# Altium PCB DualBuck(Single).PcbDoc
Units mm, origin at the board's own origin, x right, y up, seen from the top; angles counter-clockwise.
Board outline 93.78 x 78.49 mm, 4 copper layers (Top Layer, GND, PWR, Bottom Layer), stack 0.603 mm thick; 41 components, 27 nets, 143 pads, 84 vias.
Unrouted connection lines stored in the file: 35.
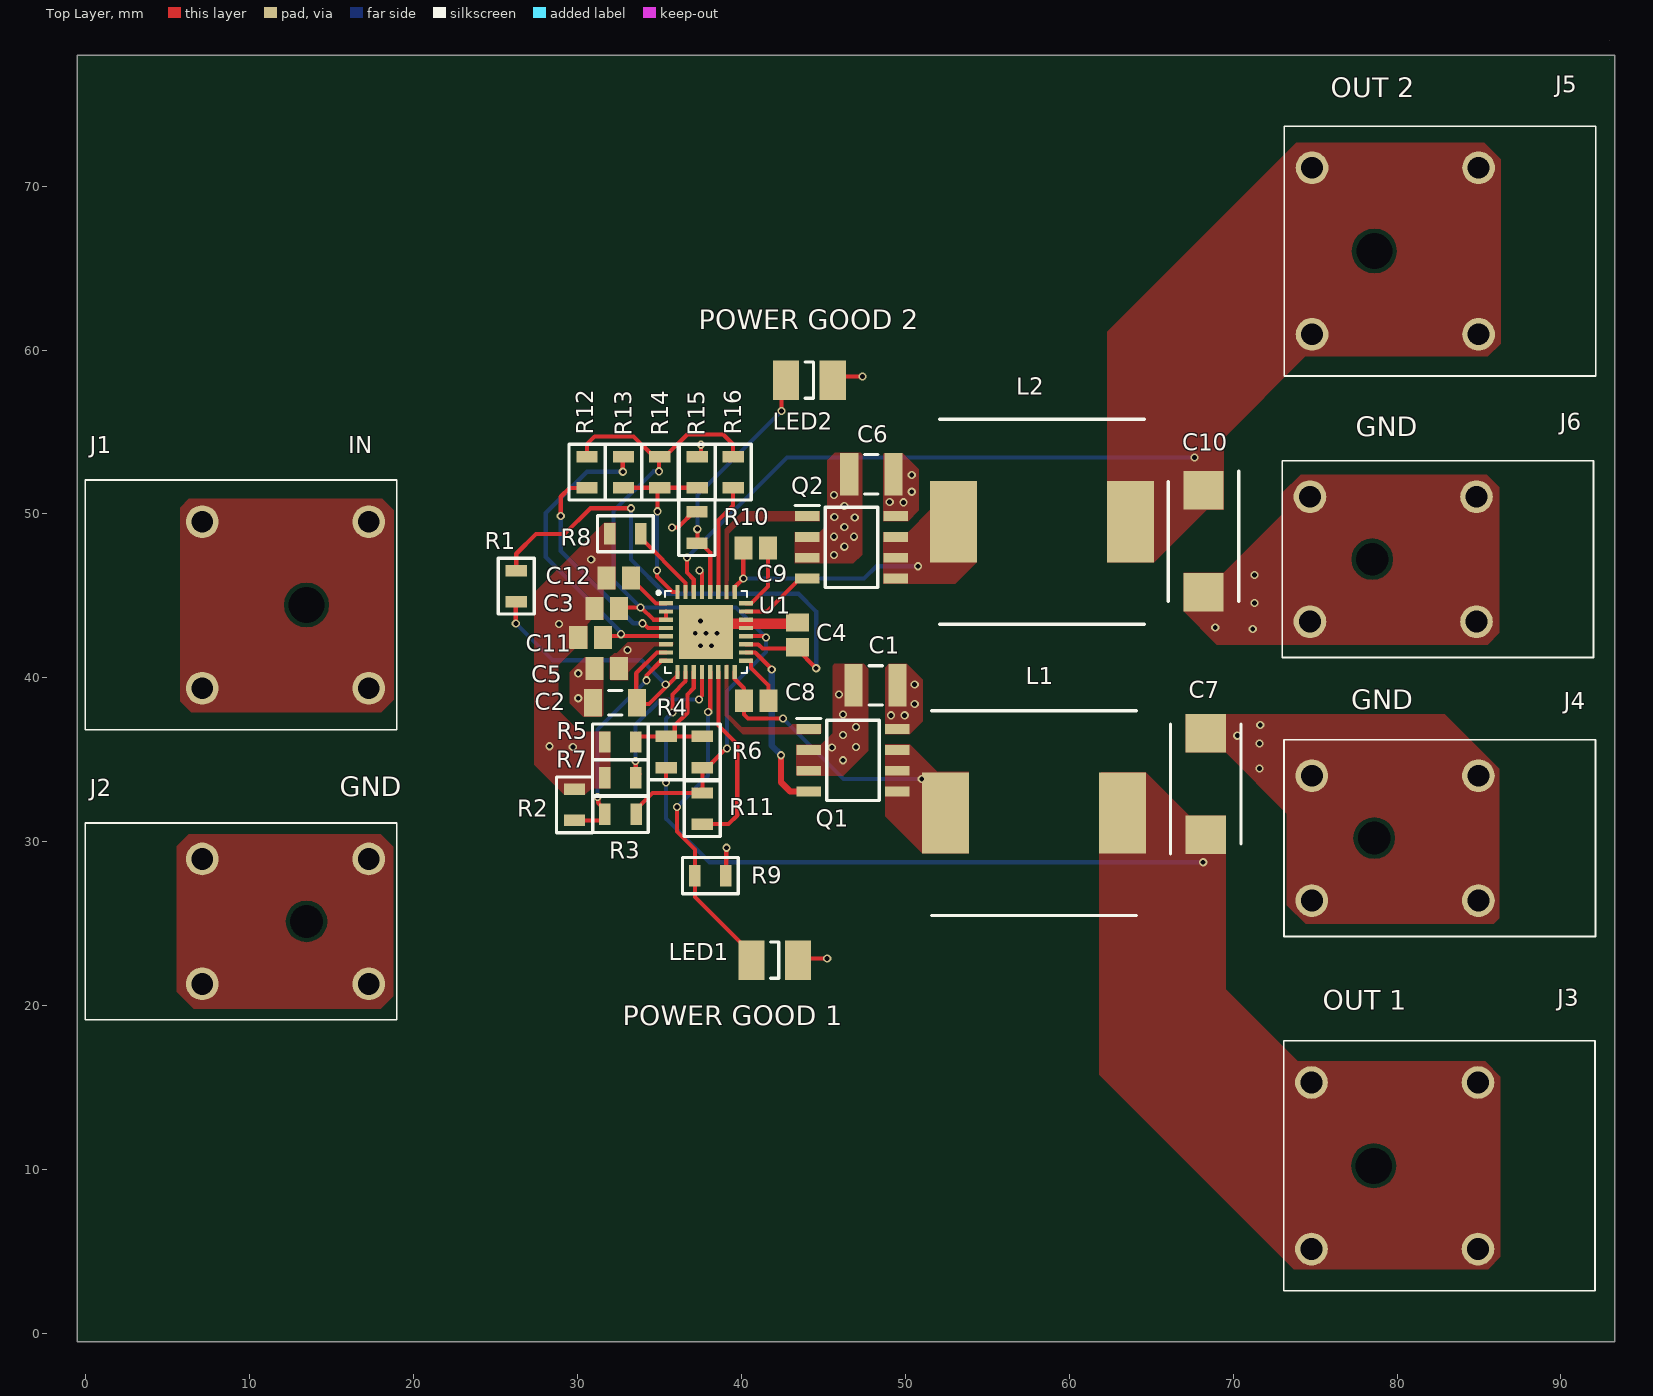
[diagram p0: Top Layer view]
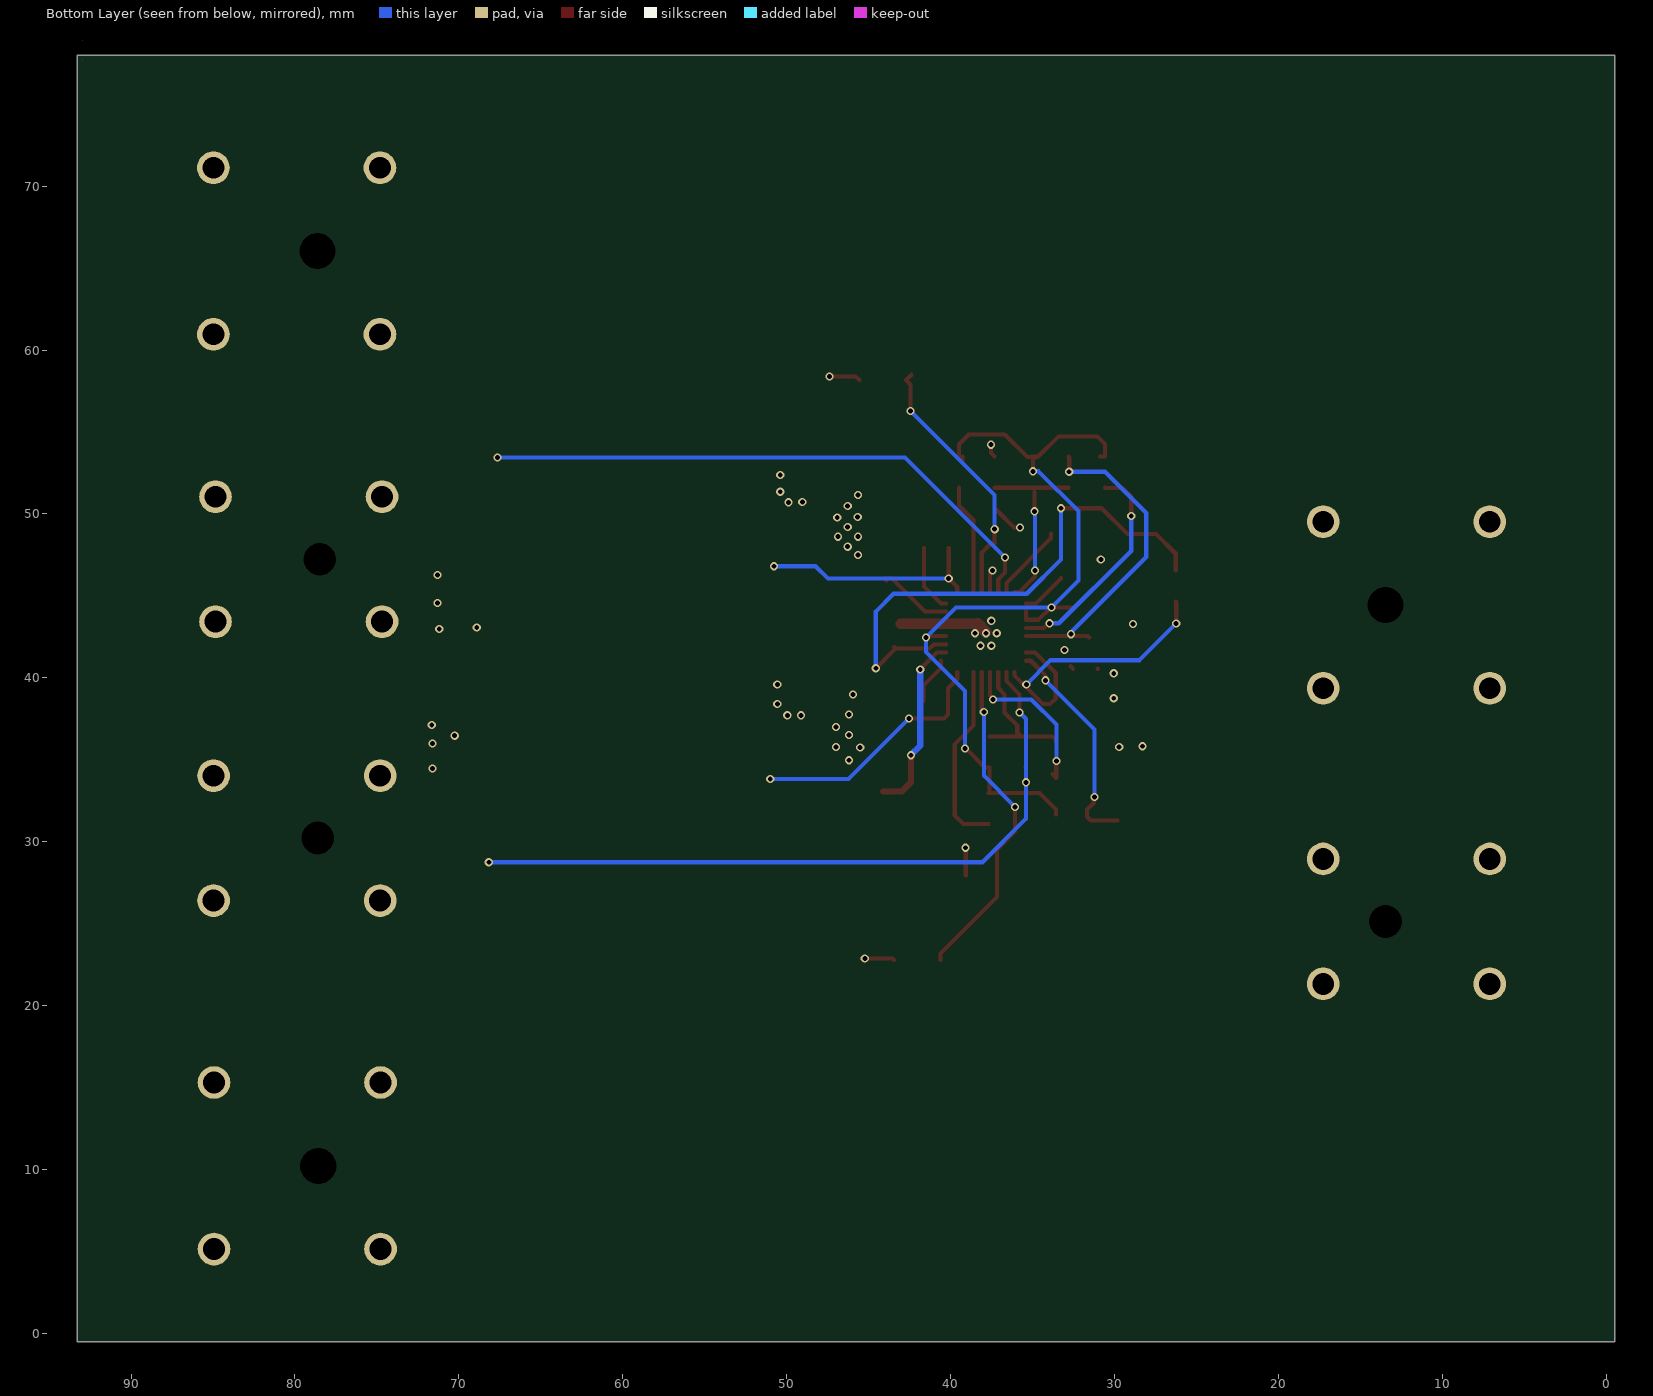
[diagram p1: Bottom Layer view, seen from below]
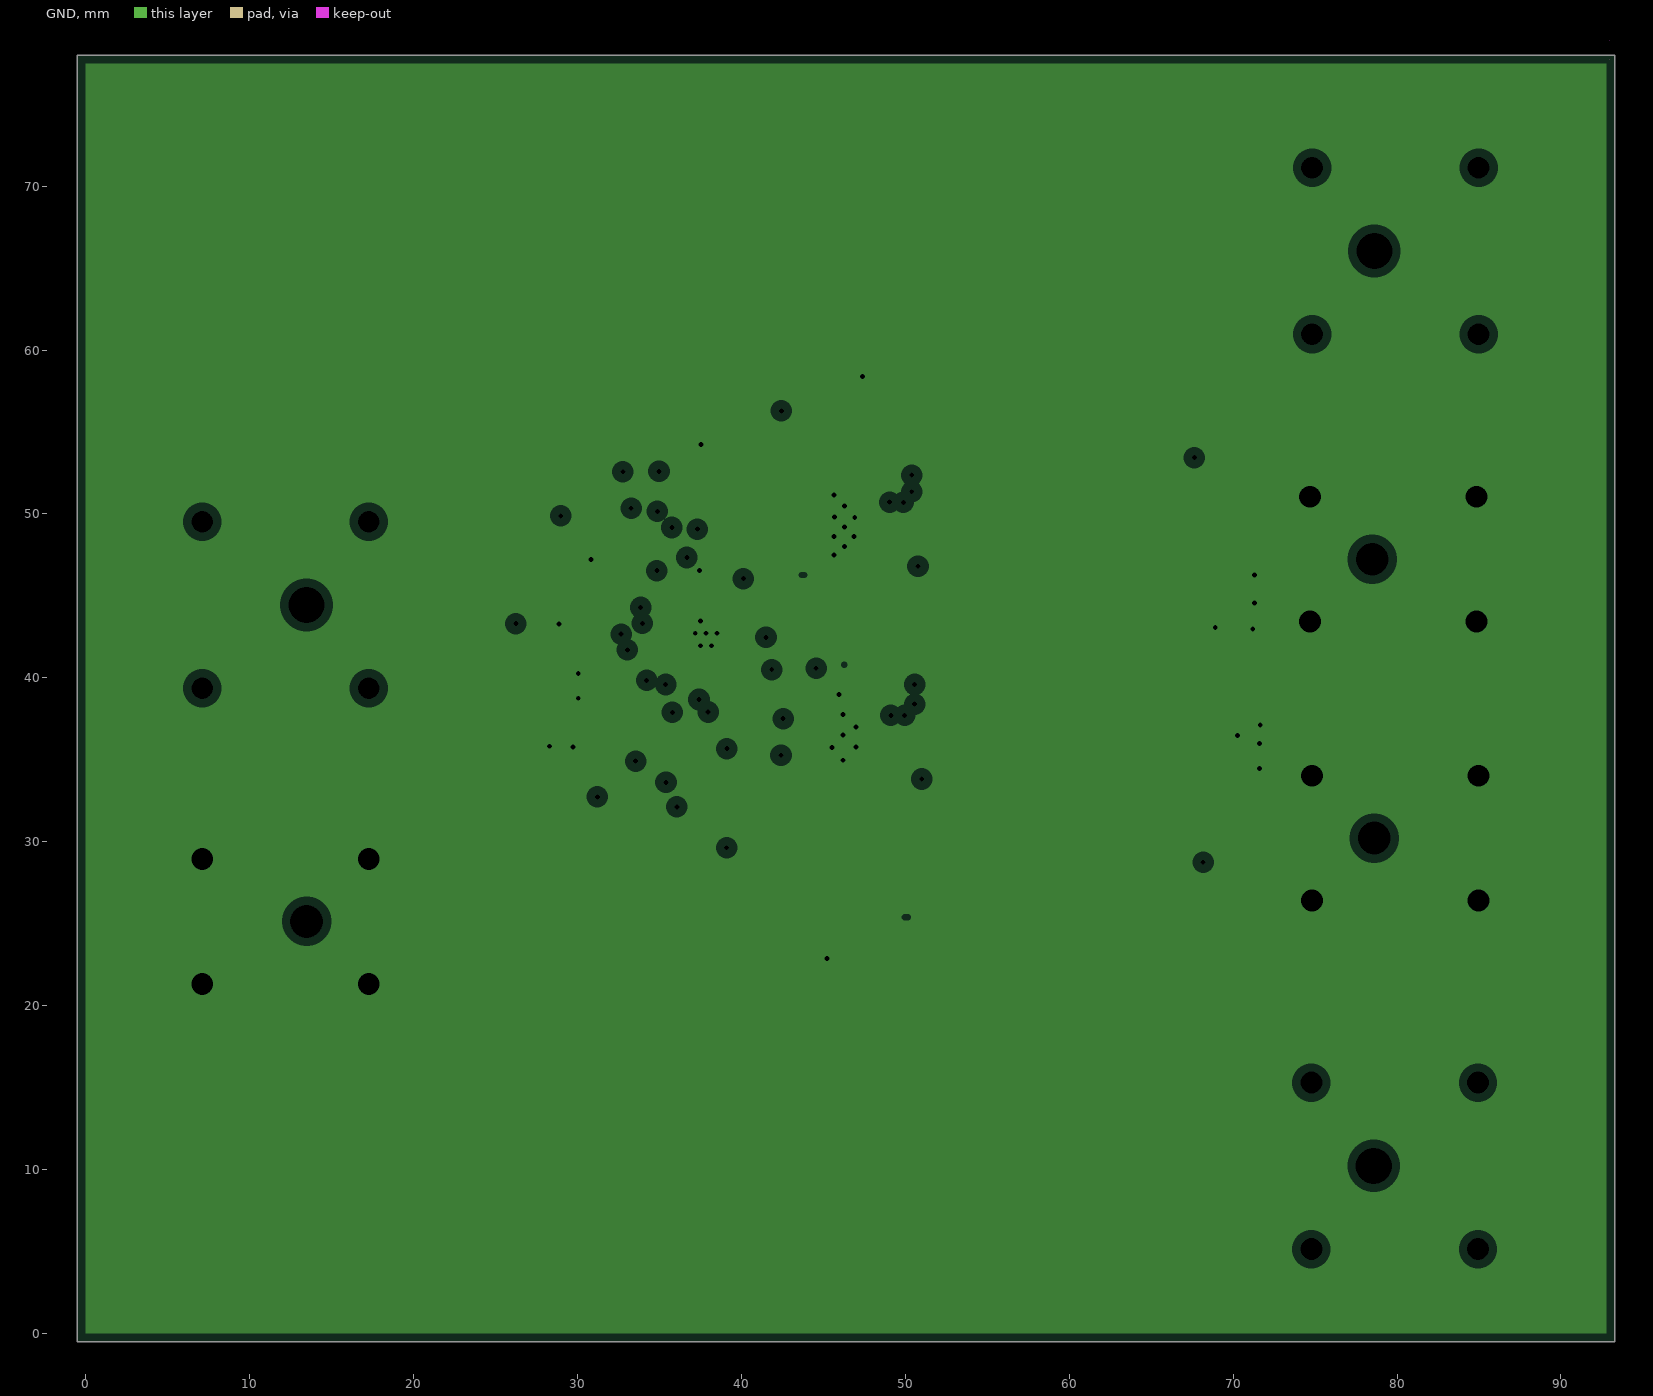
[diagram p2: GND, clearances drawn from the general rule]
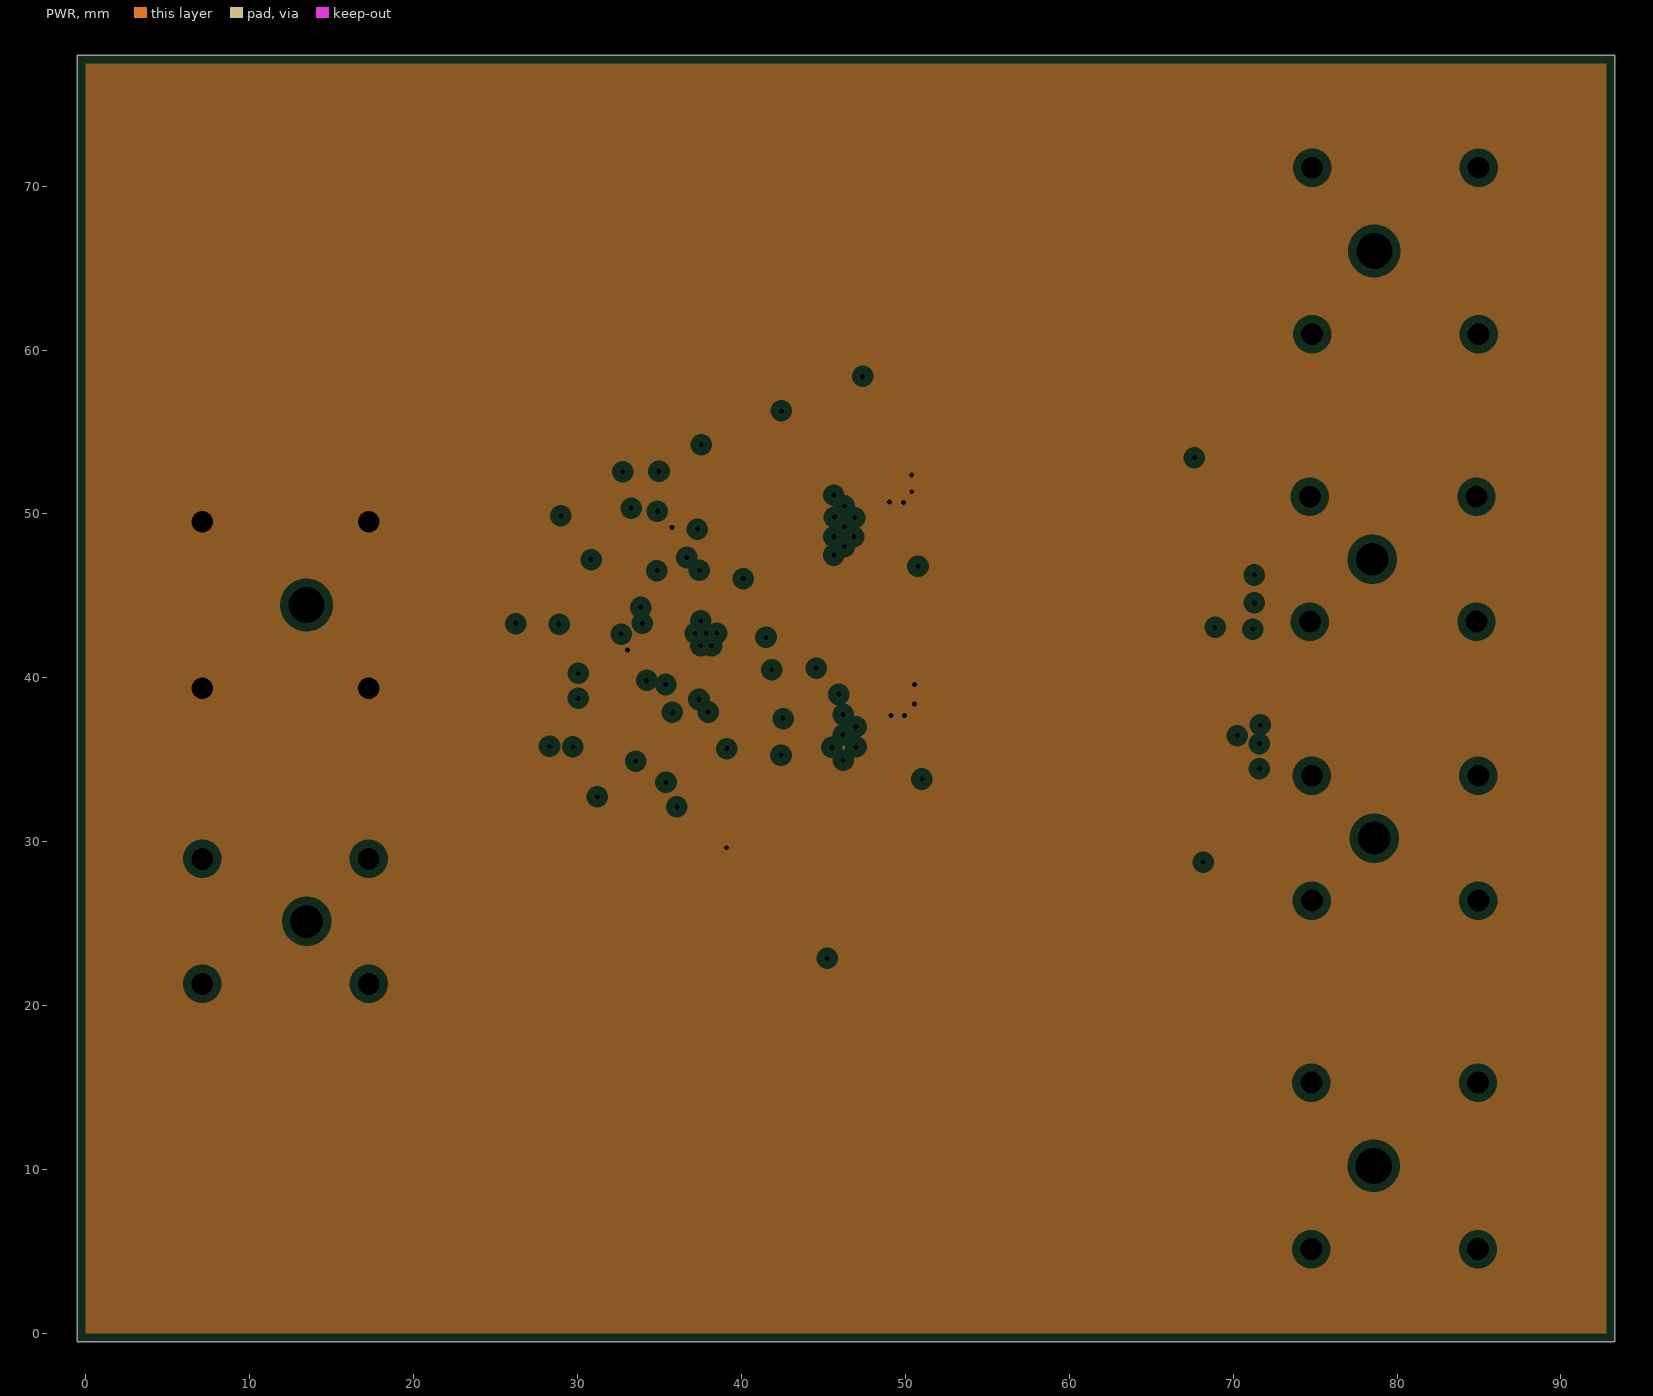
[diagram p3: PWR, clearances drawn from the general rule]
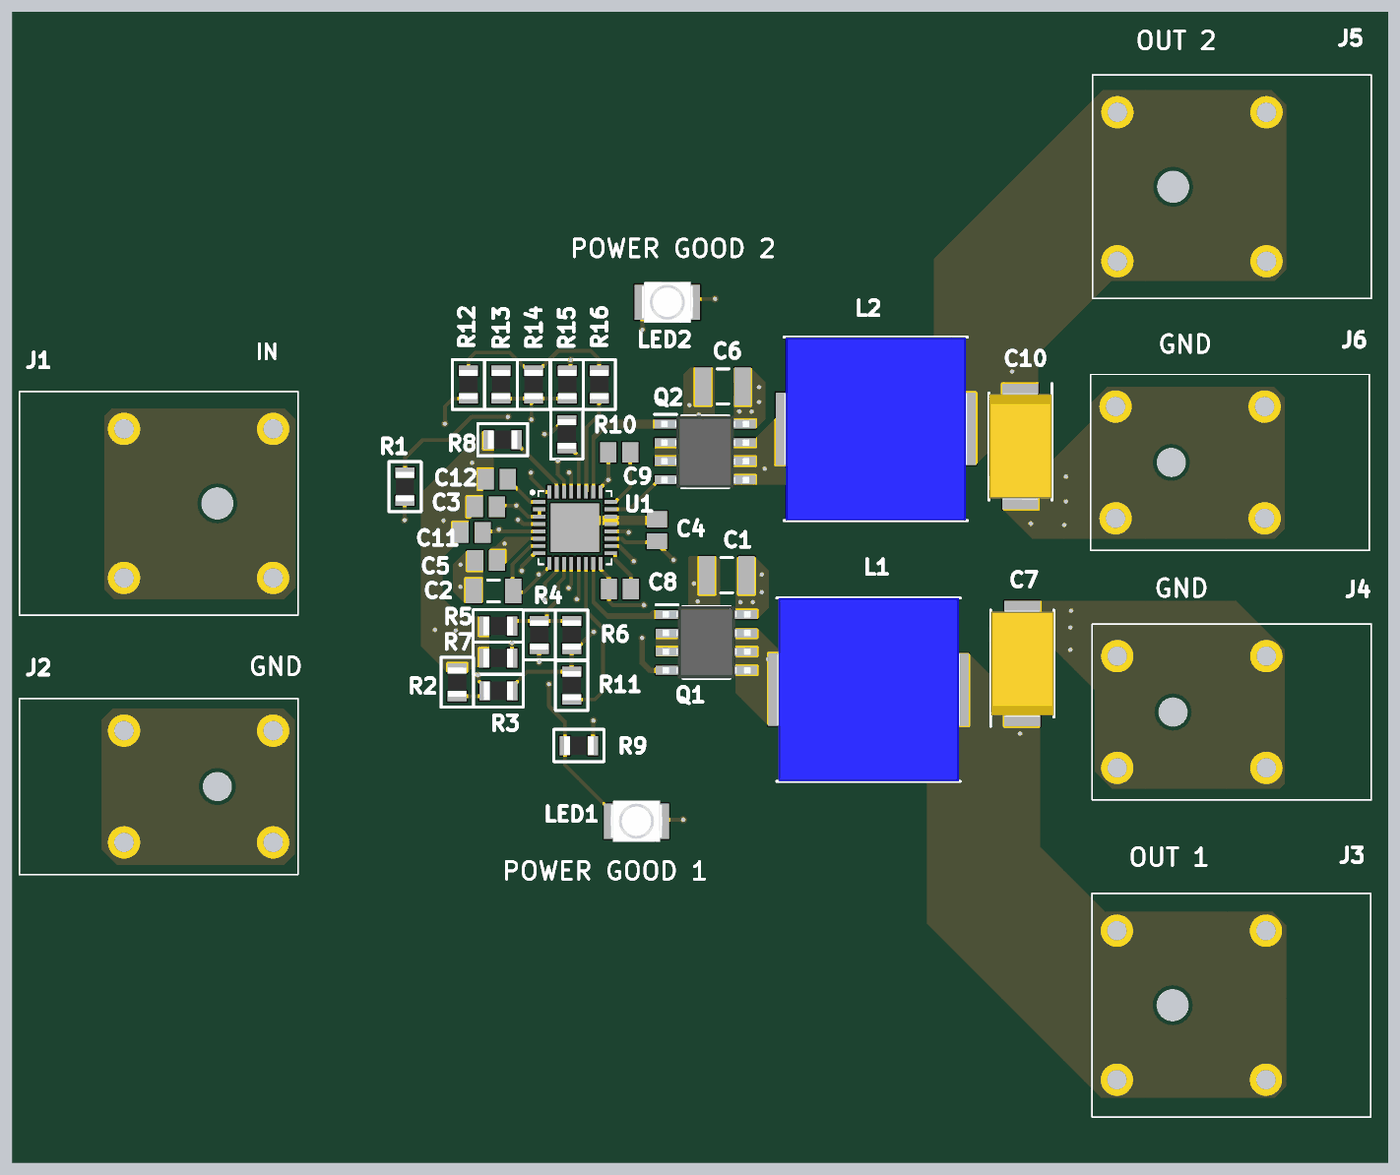
[diagram p4: 3D render of the assembled board from above, using the file's embedded part models]

## Layer stack, top to bottom
Top Solder: solder mask 0.0102, Solder Resist, Dk 3.5
Top Layer: signal copper 0.0356
Dielectric 2: prepreg 0.0711, PP-006, Dk 4.1
GND: plane copper 0.035, net GND
Dielectric 1: dielectric 0.32, FR-4, Dk 4.8
PWR: plane copper 0.035, net +VIN
Dielectric 3: prepreg 0.0711, PP-006, Dk 4.1
Bottom Layer: signal copper 0.0356
Bottom Solder: solder mask 0.0102, Solder Resist, Dk 3.5

## Board outline
-0.508,-0.508 93.272,-0.508 93.272,77.978 -0.508,77.978
cut-out: 92.964,77.724
cut-out: 92.964,78.867
cut-out: 92.075,80.391

## Design rules (kind name [scope] priority, off if disabled: settings)
Clearance [All] p1: gap=0.254 ignorepadtopadclearanceinfootprint=TRUE except(0: Arc-Hole Track-Hole SMDPad-Hole THPad-Hole Via-Hole Fill-Hole Poly-Hole Region-Hole Text-Hole; 0.152: SMDPad-SMDPad; 0.229: Arc-Arc Arc-Track Arc-SMDPad Arc-Fill Arc-Poly Arc-Region Track-Track Track-SMDPad Track-Fill Track-Poly Track-Region)
MinimumSolderMaskSliver [All] p1: minsoldermaskwidth=0.1
PlaneClearance [All] p1: clearance=0.508
PlaneConnect [All] p1: pad.planeconnectstyle=Relief pad.reliefexpansion=0.508 pad.reliefentries=4 pad.reliefconductorwidth=0.635 pad.reliefairgap=0.254 via.planeconnectstyle=Direct via.reliefexpansion=0.508 via.reliefentries=4 via.reliefconductorwidth=0.635 via.reliefairgap=0.254
PolygonConnect [All] p1: connectstyle=Direct reliefconductorwidth=0.254 reliefentries=4 polygonreliefangle="90 Angle" airgapwidth=0.254
RoutingVias [All] p1: holewidth=0.711 width=1.27 viastyle="Through Hole" minholewidth=0.3 minwidth=0.5 maxholewidth=0.711 maxwidth=1.27
SilkToSolderMaskClearance [IsPad] p1: minsilkscreentomaskgap=0.1 clearancetoexposedcopper=TRUE
SolderMaskExpansion [All] p1: expansion=0.102
Width [All] p1: maxlimit=1.27 minlimit=0.203 preferedwidth=0.254 minimp=50.000000 maximp=50.000000 favimp=50.000000
26 further rules are at their usual default settings.

## Components (designator, comment, footprint, x,y, rotation, side; value= is the part's Value field where it differs from the comment)
C1 "" C1210 48.188,39.548 r0 top value=10uF
C2 "" C1206 32.293,38.481 r0 top value=4.7uF
C3 "" C0805 31.775,44.221 r0 top value="1uF, 50V"
C4 "" C0805 43.434,42.621 r270 top value=1uF
C5 "" C0805 31.787,40.564 r0 top value=1uF
C6 "" C1210 47.93,52.426 r0 top value=10uF
C7 "330uF, 10V" CAPPM7343X430N 68.326,33.528 r90 top
C8 "" C0805 40.906,38.608 r180 top value=100nF
C9 "" C0805 40.869,47.93 r0 top value=220nF
C10 "330uF, 10V" CAPPM7343X430N 68.199,48.335 r270 top
C11 "" C0805 30.797,42.469 r0 top value=10nF
C12 "" C0805 32.524,46.101 r0 top value=100nF
J1 "23.3200-21" 23320021 17.272,39.37 r180 top
J2 "23.3200-22" 23320022 17.272,21.336 r0 top
J3 "23.3200-21" 23320021 74.778,15.316 r0 top
J4 "23.3200-22" 23320022 74.803,34.036 r180 top
J5 "23.3200-21" 23320021 74.813,71.12 r0 top
J6 "23.3200-22" 23320022 74.686,51.054 r180 top
L1 "3.3uH, DR125-3R3-R" INDPM125125X600N 57.851,31.75 r180 top
L2 "2.2uH, DR125-2R2-R" INDPM125125X600N 58.344,49.53 r0 top
LED1 "150141GS73100" 3528 42.034,22.784 r180 top
LED2 "150141GS73100" 3528 44.143,58.166 r180 top
Q1 "SI4816BDY-T1-GE3" SOT127P600X175-8N 46.812,34.976 r0 top
Q2 "SI4816BDY-T1-GE3" SOT127P600X175-8N 46.718,47.964 r0 top
R1 "Res3" R0805 26.264,45.593 r270 top value=0R
R2 "Res3" R0805 29.82,32.258 r270 top value=0R
R3 "Res3" R0805 32.624,31.674 r180 top value=0R
R4 "Res3" R0805 35.408,35.484 r270 top value=1K
R5 "Res3" R0805 32.614,36.093 r0 top value=1K
R6 "Res3" R0805 37.617,35.484 r270 top value=0R
R7 "Res3" R0805 32.614,33.909 r180 top value=200K
R8 "Res3" R0805 32.918,48.793 r0 top value=200K
R9 "Res3" R0805 38.11,27.94 r180 top value=200
R10 "Res3" R0805 37.287,49.174 r270 top value=200
R11 "" R0805 37.617,32.029 r90 top value=10K
R12 "Res3" R0805 30.582,52.553 r90 top value=10K
R13 "Res3" R0805 32.807,52.553 r270 top value=0R
R14 "Res3" R0805 35.027,52.553 r270 top value=0R
R15 "Res3" R0805 37.313,52.553 r90 top value=0R
R16 "Res3" R0805 39.497,52.553 r90 top value=10K
U1 "ISL6236AIRZ" QFN50P500X500X100-33N 37.846,42.799 r0 top

## Footprints (in the part's own frame and the unit in brackets; to place one, negate y for a bottom-side part, rotate by r counter-clockwise, add the part's x,y. Pads: shape width x height; smd on the part's side, far side on the other; paste and mask are expansions set on the pad)
3528 [mm] "Chip LED, 2-Leads, Body 3.5x2.8mm, IPC Medium Density"
  rect 1.6x2.4 smd: 1(-1.425,0) 2(1.425,0)
  silkscreen extent -0.25,-1.1 0.25,1.1, body extent -1.75,-1.4 1.75,1.4, height 1.9
23320021 [mm]
  round 1.995 hole 1.33: 1(0,0) 2(0,-10.16) 3(10.16,-10.16) 4(10.16,0)
  round 1.1 hole 2.2 unplated: 5(3.8,-5.08)
  silkscreen extent -1.7,-12.7 17.3,2.54
23320022 [mm]
  round 1.995 hole 1.33: 1(0,0) 2(0,7.62) 3(-10.16,7.62) 4(-10.16,0)
  round 1 hole 2 unplated: MH1(-3.8,3.81)
  silkscreen extent -17.3,-2.19 1.7,9.81
C0805 [mm] "Chip Capacitor, Body 2.0x1.3mm, IPC High Density"
  rect 1.1x1.4 smd: 1(-0.75,0) 2(0.75,0)
  body extent -1.1,-0.72 1.1,0.72, height 1.4
C1206 [mm] "Chip Capacitor, Body 3.2x1.6mm, IPC High Density"
  rect 1.1x1.7 smd: 1(-1.35,0) 2(1.35,0)
  silkscreen extent -0.4,-0.75 0.4,0.75, body extent -1.7,-0.9 1.7,0.9, height 1.3
C1210 [mm] "Chip Capacitor, Body 3.2x2.5mm, IPC High Density"
  rect 1.1x2.6 smd: 1(-1.35,0) 2(1.35,0)
  silkscreen extent -0.4,-1.2 0.4,1.2, body extent -1.7,-1.35 1.7,1.35, height 1.3
CAPPM7343X430N [mm]
  rect 2.35x2.45 smd: 1(-3.1,0) 2(3.1,0)
  silkscreen extent -4.28,-2.15 3.65,2.15, body extent -3.65,-2.15 3.65,2.15, height 4.3
INDPM125125X600N [mm]
  rect 2.85x4.95 smd: 1(-5.4,0) 2(5.4,0)
  silkscreen extent -6.25,-6.25 6.25,6.25, body extent -6.25,-6.25 6.25,6.25, height 6
QFN50P500X500X100-33N [mm]
  rect 0.86x0.26 smd mask+0.13: 1(-2.435,1.75) 2(-2.435,1.25) 3(-2.435,0.75) 4(-2.435,0.25) 5(-2.435,-0.25) 6(-2.435,-0.75) 7(-2.435,-1.25) 8(-2.435,-1.75) 17(2.435,-1.75) 18(2.435,-1.25) 19(2.435,-0.75) 20(2.435,-0.25) 21(2.435,0.25) 22(2.435,0.75) 23(2.435,1.25) 24(2.435,1.75)
  rect 0.26x0.86 smd mask+0.13: 9(-1.75,-2.435) 10(-1.25,-2.435) 11(-0.75,-2.435) 12(-0.25,-2.435) 13(0.25,-2.435) 14(0.75,-2.435) 15(1.25,-2.435) 16(1.75,-2.435) 25(1.75,2.435) 26(1.25,2.435) 27(0.75,2.435) 28(0.25,2.435) 29(-0.25,2.435) 30(-0.75,2.435) 31(-1.25,2.435) 32(-1.75,2.435)
  rect 3.3x3.3 smd mask+0.1: 33(0,0)
  silkscreen extent -3,-2.5 2.5,2.5
R0805 [mm]
  rect 0.7x1.3 smd: 1(-0.95,0) 2(0.95,0)
  silkscreen extent -1.7,-1.1 1.7,1.1, body extent -1,-0.62 1,0.62, height 0.61
SOT127P600X175-8N [mm]
  rect 1.5x0.6 smd: 1(-2.7,1.905) 2(-2.7,0.635) 3(-2.7,-0.635) 4(-2.7,-1.905) 5(2.7,-1.905) 6(2.7,-0.635) 7(2.7,0.635) 8(2.7,1.905)
  silkscreen extent -3.45,-2.45 1.6,2.56, body extent -3,-2.45 3,2.45, height 1.75

## Part data
C1 C2 C3 C4 C5 C6 C8 C9 C11 C12: library part Cap, "Capacitor", LatestRevisionDate=17-Jul-2002, LatestRevisionNote="Re-released for DXP Platform.", PackageDescription="Radial Cap, Thru-Hole; 2 Leads; 0.3 in Pin Spacing", PackageReference=RAD-0.3, Published=8-Jun-2000, Publisher="Altium Limited"
C7 C10: library part T530X337M010ATE004, "Capacitor Polarised", Manufacturer_Name=Kemet, Mouser Part Number=80-T530X337M010ATE4, RS Part Number=6925817, Datasheet Link=http://capacitoredge.kemet.com/capedge2/DataSheet?pn=T530X337M010ATE004, Height=4.3mm, Manufacturer_Part_Number=T530X337M010ATE004, Mouser Price/Stock=https://www.mouser.com/Search/Refine.aspx?Keyword=80-T530X337M010ATE4, RS Price/Stock=https://uk.rs-online.com/web/p/products/6925817
J1 J3 J5: "Connector", Manufacturer_Name="Multi Contact", RS Part Number=4225051, Datasheet Link=https://docs-emea.rs-online.com/webdocs/025b/0900766b8025b994.pdf, Height=11mm, Manufacturer_Part_Number=23.3200-21, RS Price/Stock=http://uk.rs-online.com/web/p/products/4225051
J2 J4 J6: "Connector", Manufacturer_Name="Multi Contact", RS Part Number=4225067, Datasheet Link=http://www.farnell.com/datasheets/2827925.pdf?_ga=2.233889822.1621494036.1565215269-167411096.1502103357, Height=14.9mm, Manufacturer_Part_Number=23.3200-22, RS Price/Stock=http://uk.rs-online.com/web/p/products/4225067
L1: library part DR125-3R3-R, "Inductor", Manufacturer_Name="Cooper Bussmann", RS Part Number=7700974, Datasheet Link=http://www.cooperindustries.com/content/dam/public/bussmann/Electronics/Resources/product-datasheets/Bus_Elx_DS_4315_DR_Series.pdf, Height=6mm, Manufacturer_Part_Number=DR125-3R3-R, RS Price/Stock=https://uk.rs-online.com/web/p/products/7700974
L2: library part DR125-2R2-R, "Inductor", Manufacturer_Name="Cooper Bussmann", RS Part Number=7700968, Datasheet Link=http://www1.cooperbussmann.com/pdf/4a32919a-7470-4ae0-be45-b59e3a1351ef.pdf, Height=6mm, Manufacturer_Part_Number=DR125-2R2-R, RS Price/Stock=https://uk.rs-online.com/web/p/products/7700968
LED1 LED2: "SMD mono-color Top LED, WL-SMTW, Green", Color=Green, ComponentLink1Description="Manufacturer URL", ComponentLink1URL=http://www.we-online.com, ComponentLink2Description=Datasheet, ComponentLink2URL=http://katalog.we-online.com/led/datasheet/150141GS73100.pdf, PackageReference=3528, PartNumber=150141GS73100
Q1 Q2 U1: "Integrated Circuit"
R1 R2 R3 R4 R5 R6 R7 R8 R9 R10 R12 R13 R14 R15 R16: "Resistor", LatestRevisionDate=29-May-2009, LatestRevisionNote="IPC-7351 Footprint Added.", PackageDescription="Chip Resistor", PackageReference=J1-0603, Published=8-Jun-2000, Publisher="Altium Limited"
R11: library part Res3, "Resistor", LatestRevisionDate=29-May-2009, LatestRevisionNote="IPC-7351 Footprint Added.", PackageDescription="Chip Resistor", PackageReference=J1-0603, Published=8-Jun-2000, Publisher="Altium Limited"

## Via types
v1: diameter 0.5, hole 0.3, Top Layer to Bottom Layer, tented both sides, 84 vias

## Nets (pads, with @x,y where several pads share a name; then routed paths per layer and width w, separated by ;. In a path a pad name is that pad's centre, name@x,y a point inside that pad or via, vN(x,y) a via of type N, cw(c..) or ccw(c..) an arc to the next point about the centre after c; other vN are vias at no path point)
"+5V LDO": C2.2 R1.2 U1.7 U1.9 | length 19.5
  Top Layer w0.254: v1(26.238,43.311) 26.238,44.618 R1.2 ; U1.7 35.408,41.546 34.845,41.546 33.583,40.284 33.583,38.756 33.934,38.405 34.363,38.405 35.469,39.511 36.096,40.138 U1.9
  Bottom Layer w0.254: v1(26.238,43.311) 28.468,41.081 33.9,41.081 v1(35.382,39.599)
"+5V PVCC": C4.2 R1.1 U1.19 | length 33.4
  Top Layer w0.254: R1.1 26.264,47.574 27.461,48.772 29.217,48.772 30.796,50.35 v1(33.274,50.35) ; U1.19 40.284,42.046 41.029,42.046 41.28,41.795 C4.2@43.358,41.795 ; C4.2 C4.2@43.358,41.795 ; v1(44.564,40.589) C4.2@43.358,41.795
  Bottom Layer w0.254: v1(33.274,50.35) 33.274,47.219 35.357,45.136 43.485,45.136 44.564,44.057 v1(44.564,40.589)
+VIN: C1.2 C5.2 C6.2 J1.1 J1.2 J1.3 J1.4 Q1.8 Q2.8 R9.1 R10.1 U1.6 | length 3.9
  Top Layer w0.254: C5.2 C5.2@32.69,40.716 ; v1(35.763,49.174) 36.134,49.174 37.186,50.226 R10.1 ; R9.1 39.077,27.957 39.077,29.621 v1(39.094,29.638)
  other v1: 49.124,37.719 49.962,37.719 50.571,38.405 50.571,39.599 33.045,41.712 49.047,50.724 49.886,50.714 50.394,51.359 50.394,52.375
BOOT1: C8.1 U1.17 | length 2.9
  Top Layer w0.254: U1.17@40.581,41.049 40.584,41.046 40.584,40.607 41.656,39.535 C8.1
BOOT2: C9.2 U1.24 | length 4.1
  Top Layer w0.254: U1.24 40.581,44.549 41.619,45.587 C9.2
EN1: R11.1 U1.14 | length 11.5
  Top Layer w0.254: R11.1@37.694,31.079 39.207,31.079 39.751,31.623 39.751,35.944 38.604,37.091 38.604,40.356 U1.14
EN2: R16.1 U1.27 | length 6.7
  Top Layer w0.254: U1.27 38.61,45.248 38.61,49.634 39.497,50.521 R16.1
"EN LDO": R12.1 U1.4 | length 13.5
  Top Layer w0.254: v1(28.981,49.886) 28.981,51.054 29.505,51.577 30.556,51.577 R12.1 ; v1(33.96,43.332) 34.026,43.332 34.31,43.049 U1.4
  Bottom Layer w0.254: v1(28.981,49.886) 28.981,47.752 33.401,43.332 v1(33.96,43.332)
FB1: R4.1 R5.2 R6.1 U1.11 | length 8.8
  Top Layer w0.254: R5.2 33.564,36.211 33.787,36.434 R4.1 R4.1@35.708,36.434 ; U1.11 37.093,40.361 37.093,39.379 36.704,38.99 36.704,37.873 35.931,37.099 35.931,36.657 R4.1@35.708,36.434 ; R6.1 R4.1@35.708,36.434
GND: C1.1 C2.1 C3.1 C4.1 C5.1 C6.1 C7.2 C10.2 C11.1 C12.1 J2.1 J2.2 J2.3 J2.4 J4.1 J4.2 J4.3 J4.4 J6.1 J6.2 J6.3 J6.4 LED1.1 LED2.1 Q1.2 Q1.3 Q2.2 Q2.3 R2.1 R5.1 R7.2 R8.1 R15.2 U1.21 U1.22 U1.29 U1.33 | length 11.4
  Top Layer w0.254: C5.1@31.012,40.538 C5.1 ; R15.2 37.318,53.503 37.541,53.726 v1(37.541,54.229) ; v1(37.44,46.558) 37.599,46.399 37.599,45.237 U1.29 ; LED1.1 43.561,22.885 v1(45.232,22.885) ; LED2.1 45.796,58.395 v1(47.394,58.395)
  Top Layer w0.635: U1.33@38.354,43.307 C4.1@43.053,43.307
  Top Layer w0.711: U1.33 U1.33@38.354,43.307
  other v1: 71.603,34.468 46.203,34.976 45.517,35.763 29.718,35.789 46.99,35.789 28.296,35.83 71.603,35.992 70.256,36.474 46.203,36.525 46.99,37.008 71.653,37.135 46.203,37.77 30.047,38.76 45.949,38.989 30.047,40.282 37.516,41.961 38.176,41.961 37.186,42.723 37.846,42.723 38.506,42.723 71.196,42.977 68.91,43.078 28.88,43.282 37.516,43.485 71.298,44.577 71.298,46.279 30.836,47.219 45.644,47.498 46.279,48.006 45.644,48.616 46.863,48.616 46.279,49.2 46.914,49.784 45.669,49.809 46.279,50.495 45.644,51.156
ILIM1: R7.1 U1.12 | length 9.8
  Top Layer w0.254: v1(33.548,34.925) 33.556,34.917 33.556,33.932 33.548,33.924 R7.1 R7.1@33.787,34.132 ; v1(37.414,38.684) 37.414,38.751 37.596,38.933 U1.12
  Bottom Layer w0.254: v1(33.548,34.925) 33.548,37.152 35.081,38.684 v1(37.414,38.684)
ILIM2: R8.2 U1.31 | length 4.7
  Top Layer w0.254: R8.2 33.868,48.524 36.593,45.8 36.593,45.237 U1.31
LDOREFIN: R2.2 R3.2 U1.8 | length 13.6
  Top Layer w0.254: R2.2 31.451,31.308 31.674,31.531 R3.2 31.674,31.974 31.264,32.384 31.264,32.694 v1(31.217,32.741) ; v1(34.214,39.853) 34.214,40.152 35.111,41.049 U1.8
  Bottom Layer w0.254: v1(31.217,32.741) 31.217,36.855 v1(34.214,39.853)
LGATE1: Q1.4 U1.18 | length 11.1
  Top Layer w0.254: U1.18 40.284,41.546 40.847,41.546 41.851,40.542 v1(41.851,40.505)
  Top Layer w0.381: v1(42.418,35.281) 42.418,33.63 42.977,33.071 Q1.4
  Bottom Layer w0.381: v1(41.851,40.505) 41.851,35.875 42.418,35.307 v1(42.418,35.281)
LGATE2: Q2.4 U1.23 | length 4.7
  Top Layer w0.254: U1.23 41.559,44.049 43.568,46.059 Q2.4 Q2.4@43.914,45.954
OUT1: C7.1 J3.1 J3.2 J3.3 J3.4 L1.1 R4.2 U1.10 | length 44.3
  Top Layer w0.254: v1(35.402,33.63) 35.402,34.528 R4.2 R4.2@35.438,34.564 ; v1(35.789,37.897) 35.789,38.992 36.596,39.8 U1.10
  Bottom Layer w0.254: v1(35.789,37.897) 35.402,37.51 v1(35.402,33.63) 35.402,31.413 38.062,28.753 v1(68.174,28.753)
OUT2: C10.1 J5.1 J5.2 J5.3 J5.4 L2.2 U1.30 | length 35.8
  Top Layer w0.254: v1(36.678,47.346) 36.678,46.428 37.096,46.009 U1.30
  Bottom Layer w0.254: v1(36.678,47.346) 42.774,53.442 v1(67.64,53.442)
PHASE1: C8.2 L1.2 Q1.5 Q1.6 Q1.7 U1.16 | length 15.3
  Top Layer w0.254: U1.16 39.596,39.931 40.156,39.371 C8.2 40.156,37.771 40.411,37.516 v1(42.545,37.516)
  Bottom Layer w0.254: v1(42.545,37.516) 46.228,33.833 v1(51.003,33.833)
PHASE2: C9.1 L2.1 Q2.5 Q2.6 Q2.7 U1.25 | length 13.9
  Top Layer w0.254: U1.25 39.596,45.534 v1(40.119,46.057) C9.1
  Bottom Layer w0.254: v1(40.119,46.057) 47.479,46.057 48.235,46.812 v1(50.775,46.812)
POK1: LED1.2 R9.2 U1.13 | length 20.3
  Top Layer w0.254: v1(36.068,32.131) 36.068,30.632 37.16,29.54 R9.2 37.16,26.633 40.609,23.184 LED1.2 ; v1(37.973,37.922) 37.973,37.989 38.096,38.112 U1.13
  Bottom Layer w0.254: v1(36.068,32.131) 37.973,34.036 v1(37.973,37.922)
POK2: LED2.2 R10.2 U1.28 | length 16.1
  Top Layer w0.254: v1(37.313,49.073) 37.313,48.25 R10.2 37.521,48.224 38.096,47.65 U1.28 ; LED2.2@42.387,58.496 LED2.2 42.438,57.887 v1(42.438,56.286)
  Bottom Layer w0.254: v1(37.313,49.073) 37.313,51.161 v1(42.438,56.286)
REF: C12.2 U1.1 | length 2.8
  Top Layer w0.254: C12.2 33.274,46.073 34.798,44.549 U1.1
REFIN2: R13.2 R14.2 R15.1 U1.32 | length 11.3
  Top Layer w0.254: R13.2 R14.2 R15.1 ; v1(34.849,46.55) 34.849,46.177 35.792,45.234 U1.32 ; v1(34.874,50.165) R14.2@34.874,51.349
  Bottom Layer w0.254: v1(34.849,46.55) 34.861,46.563 34.861,50.152 v1(34.874,50.165)
UGATE1: Q1.1 U1.15
UGATE2: Q2.1 U1.26
VCC: C3.2 R3.1 R6.2 R11.2 R12.2 R14.1 R16.2 U1.2 U1.3 U1.20 | length 53.3
  Top Layer w0.254: R12.2@30.882,53.503 R12.2 30.582,54.268 31.051,54.737 33.419,54.737 34.653,53.503 R14.1 35.062,53.467 35.306,53.467 36.699,54.86 38.891,54.86 39.497,54.254 R16.2 ; C3.2 32.602,44.298 v1(33.85,44.298) 33.887,44.298 34.633,43.552 35.408,43.552 U1.3 U1.2 ; R3.1 33.574,31.974 34.579,32.979 R11.2@37.694,32.979 ; R14.1@34.777,53.452 34.976,53.452 v1(34.976,52.603) ; R11.2@37.617,33.056 R6.2 37.917,34.534 39.071,35.687 v1(39.116,35.687) ; R16.2@39.268,53.274 R16.2@39.268,53.503 ; U1.20 41.357,42.549 41.437,42.469 v1(41.504,42.469)
  Bottom Layer w0.254: v1(34.976,52.603) 34.635,52.603 32.207,50.176 32.207,45.94 v1(33.85,44.298) 39.675,44.298 v1(41.504,42.469) 41.504,41.58 39.116,39.192 v1(39.116,35.687)
VREF3: C11.2 R13.1 U1.5 | length 19.9
  Top Layer w0.254: C11.2 31.627,42.549 v1@32.649,42.549 ; v1(32.664,42.666) 32.782,42.549 U1.5 ; v1(32.766,52.578) 32.766,53.462 R13.1
  Bottom Layer w0.254: v1(32.664,42.666) 32.664,42.784 28.067,47.381 28.067,50.063 30.582,52.578 v1(32.766,52.578)
pads on no net: J1.5 J2.MH1 J3.5 J4.MH1 J5.5 J6.MH1

## Polygon pours and split planes (outlines as drawn)
UGATE2 on Top Layer "Top Layer-UGATE2 2" (solid, pour order 154): 38.98,49.064 40.081,50.165 44.768,50.165 44.768,49.555 39.98,49.555 39.218,48.793 39.218,44.803 38.98,44.803
OUT1 on Top Layer "Top Layer-OUT1" (solid, pour order 204): 61.824,15.799 73.685,3.937 85.573,3.937 86.309,4.674 86.309,15.672 85.369,16.612 73.939,16.612 69.545,21.006 69.545,29.362 69.545,31.598 67.31,31.598 64.668,34.239 61.849,34.239 61.824,34.214
OUT1 on Top Layer "Top Layer-OUT1 1" (solid, pour order 200): 66.142,30.963
OUT1 on Top Layer "Top Layer-OUT1 2" (solid, pour order 196): 61.824,34.214
GND on Top Layer "Top Layer-GND 3" (solid, pour order 194): 43.269,46.99 46.838,46.99 47.371,47.523 47.371,53.645 47.29,53.726 45.695,53.726 45.237,53.268 45.237,49.364 44.768,48.895 43.269,48.895
GND on Top Layer "Top Layer-GND 8" (solid, pour order 192): 43.358,35.916 43.358,34.061 43.383,34.036 46.228,34.036 47.752,35.56 47.752,40.557 47.454,40.855 45.68,40.855 45.568,40.743 45.568,36.627 44.856,35.916
UGATE1 on Top Layer "Top Layer-UGATE1" (solid, pour order 172): 38.98,37.677 40.081,36.576 44.862,36.576 44.862,37.186 43.434,37.186 43.104,37.186 42.901,36.982 40.028,36.982 39.212,37.798 39.212,40.791 38.98,40.793
+VIN on Top Layer "Top Layer-+VIN 1" (solid, pour order 186): 50.267,36.576 51.054,37.363 51.054,39.887 50.089,40.853 48.997,40.853 48.768,40.624 48.768,36.576
+VIN on Top Layer "Top Layer-+VIN 2" (solid, pour order 182): 50.165,49.555 50.825,50.216 50.825,52.73 49.835,53.721 48.717,53.721 48.666,53.67 48.666,49.555
OUT2 on Top Layer "Top Layer-OUT2" (solid, pour order 70): 62.306,47.066 65.176,47.066 68.377,50.267 69.418,50.267 69.418,54.635 74.397,59.614 85.547,59.614 86.335,60.401 86.335,71.628 85.319,72.644 73.838,72.644 62.306,61.112
PHASE2 on Top Layer "Top Layer-PHASE2 1" (solid, pour order 60): 54.356,51.994 51.537,51.994 51.537,50.267 50.165,48.895 48.666,48.895 48.666,45.745 53.035,45.745 54.356,47.066
PHASE1 on Top Layer "Top Layer-PHASE1" (solid, pour order 58): 48.768,35.941 50.267,35.941 51.943,34.265 53.873,34.265 53.873,29.312 51.029,29.312 48.768,31.572
no net on Top Layer "Top Layer-No Net 1" (solid, pour order 174): 47.498,33.071
no net on Top Layer "Top Layer-No Net 6" (solid, pour order 156): 39.853,44.171
GND on Top Layer "Top Layer-GND 4" (solid, pour order 152): 32.322,49.454 31.623,49.454 27.356,45.187 27.356,34.696 29.185,32.868 30.455,32.868 30.861,33.274 32.004,33.274 32.004,36.715 32.018,36.728 30.124,36.728 28.829,38.024 28.829,40.767 29.845,41.783 30.582,41.783 30.582,43.288 30.829,43.536 31.572,43.536 31.572,45.339 31.648,45.416 32.322,45.416
+VIN on Top Layer "Top Layer-+VIN" (solid, pour order 150): 31.979,39.864 32.004,39.839 32.018,39.853 33.096,39.853 33.096,40.335 34.696,41.935 35.839,41.935 35.839,42.164 33.071,42.164 32.41,41.504 32.233,41.504 31.979,41.25
GND on Top Layer "Top Layer-GND 6" (solid, pour order 130): 31.572,41.25 30.455,41.25 29.54,40.335 29.54,38.456 30.353,37.643 31.496,37.643 31.572,37.719
GND on Top Layer "Top Layer-GND 7" (solid, pour order 124): 31.318,34.544
GND on Top Layer "Top Layer-GND 5" (solid, pour order 96): 5.563,29.718 6.299,30.455 18.009,30.455 18.771,29.693 18.771,20.574 18.009,19.812 6.604,19.812 5.563,20.853
+VIN on Top Layer "Top Layer-+VIN 3" (solid, pour order 94): 5.766,50.394 6.299,50.927 18.085,50.927 18.796,50.216 18.796,38.677 18.034,37.915 6.433,37.915 5.766,38.583
+VIN on Top Layer "Top Layer-+VIN 4" (solid, pour order 88): 35.839,42.164
GND on Top Layer "Top Layer-GND" (solid, pour order 76): 66.98,44.069 69.012,42.037 85.522,42.037 86.233,42.748 86.233,51.638 85.471,52.4 74.117,52.4 72.974,51.257 72.974,49.962 69.418,46.406 66.98,46.406
GND on Top Layer "Top Layer-GND 1" (solid, pour order 74): 74.143,52.4
GND on Top Layer "Top Layer-GND 2" (solid, pour order 68): 67.107,35.458 69.545,35.458 73.279,31.725 73.279,26.137 74.422,24.994 85.903,24.994 86.233,25.324 86.233,34.468 82.906,37.795 67.107,37.795
PHASE2 on Top Layer "Top Layer-PHASE2" (solid, pour order 66): 86.792,19.533
UGATE2 on Top Layer "Top Layer-UGATE2" (solid, pour order 54): 48.768,35.941
UGATE2 on Top Layer "Top Layer-UGATE2 1" (solid, pour order 50): 48.768,35.941
LGATE2 on Top Layer "Top Layer-LGATE2" (solid, pour order 40): 44.856,32.766
no net on Top Layer "Top Layer-No Net 4" (solid, pour order 28): 48.514,52.832
no net on Top Layer "Top Layer-No Net 5" (solid, pour order 26): 48.514,52.832
no net on Top Layer "Top Layer-No Net 2" (solid, pour order 10): 64.668,34.239
no net on Top Layer "Top Layer-No Net 3" (solid, pour order 8): 64.668,34.239
no net on Top Layer "Top Layer-No Net" (solid, pour order 2): 3.556,74.803
+VIN on PWR (split plane): 92.762,0.002 0.002,0.002 0.002,77.468 92.762,77.468
GND on GND (split plane): 92.762,0.002 0.002,0.002 0.002,77.468 92.762,77.468

## Other copper
GND (plane layer: these items are gaps in the copper):
  region: -0.508,77.468
  lines w0.381: 43.688,46.279 43.84,46.279 ; 46.26,40.799 46.285,40.799 ; 49.973,25.4 50.165,25.4

## Silkscreen, mask and mechanical layers (free items; w line width, h text height)
Top Overlay:
  text "OUT 2" at 75.946,75.438 h1.2
  text "POWER GOOD 2" at 37.389,61.265 h1.2
  text "GND" at 77.47,54.737 h1.2
  text "IN" at 16.002,53.721 h1.02
  text "GND" at 77.216,38.1 h1.2
  text "GND" at 15.494,32.766 h1.2
  text "OUT 1" at 75.463,19.761 h1.2
  text "POWER GOOD 1" at 32.766,18.821 h1.2